# Altium PCB Pre_Amp_2017.PcbDoc
Units mm, origin at the board's own origin, x right, y up, seen from the top; angles counter-clockwise.
Board outline 152.4 x 101.6 mm, 2 copper layers (Top Layer, Bottom Layer); 45 components, 30 nets, 123 pads, 0 vias.
Unrouted connection lines stored in the file: 91.
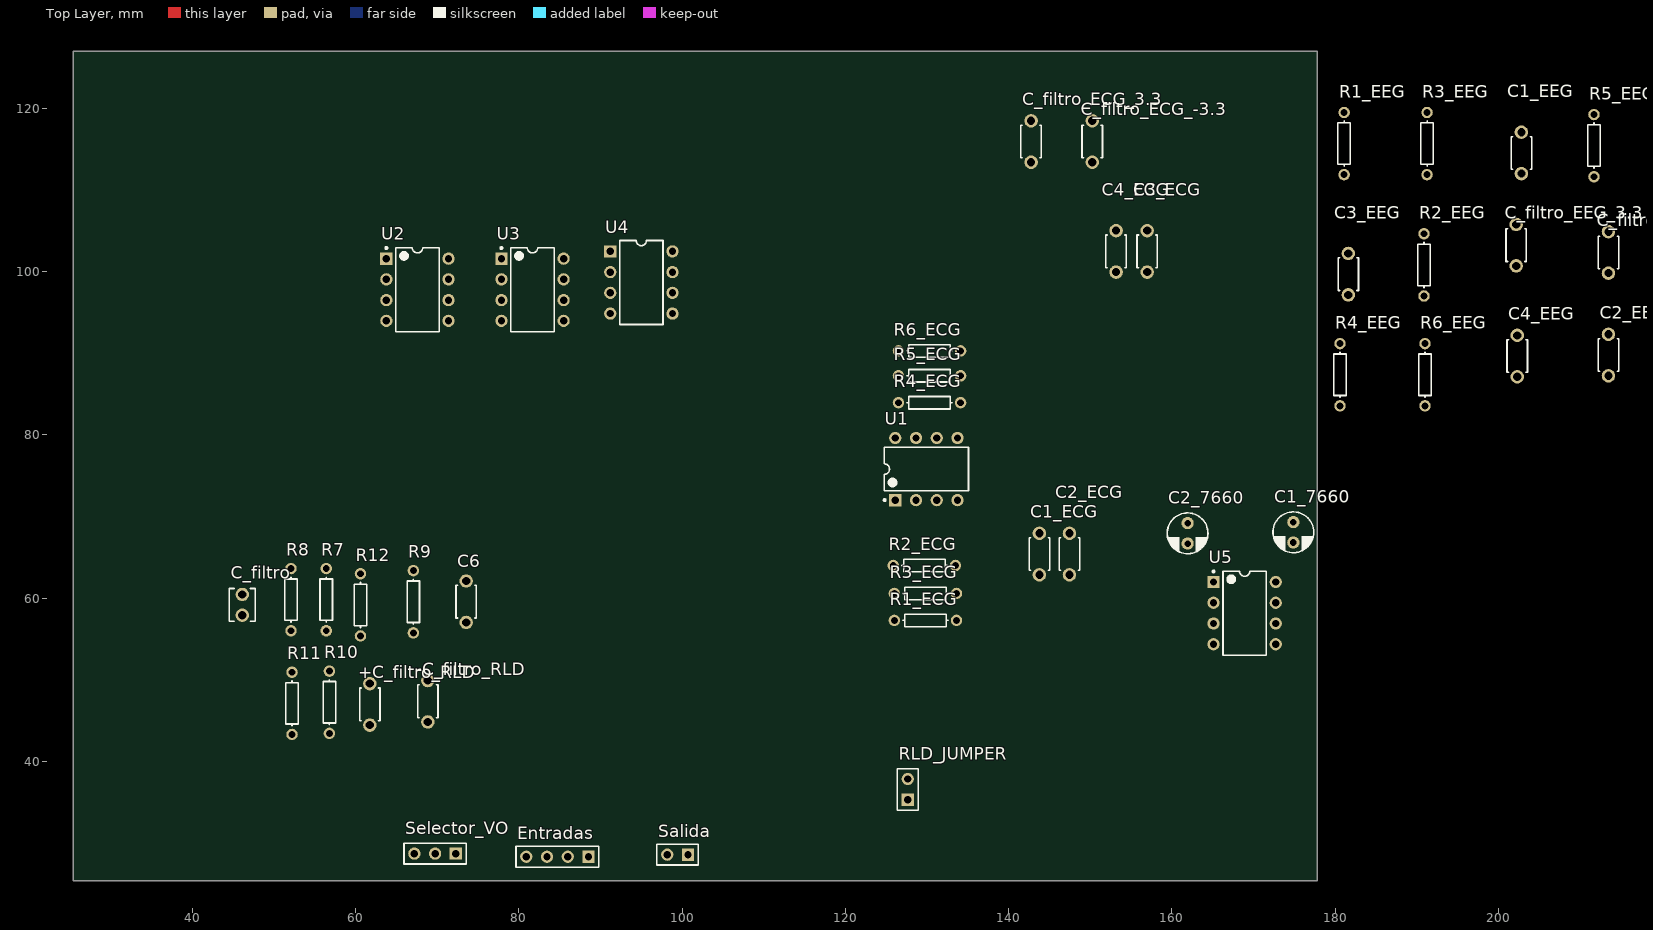
[diagram p0: Top Layer view]
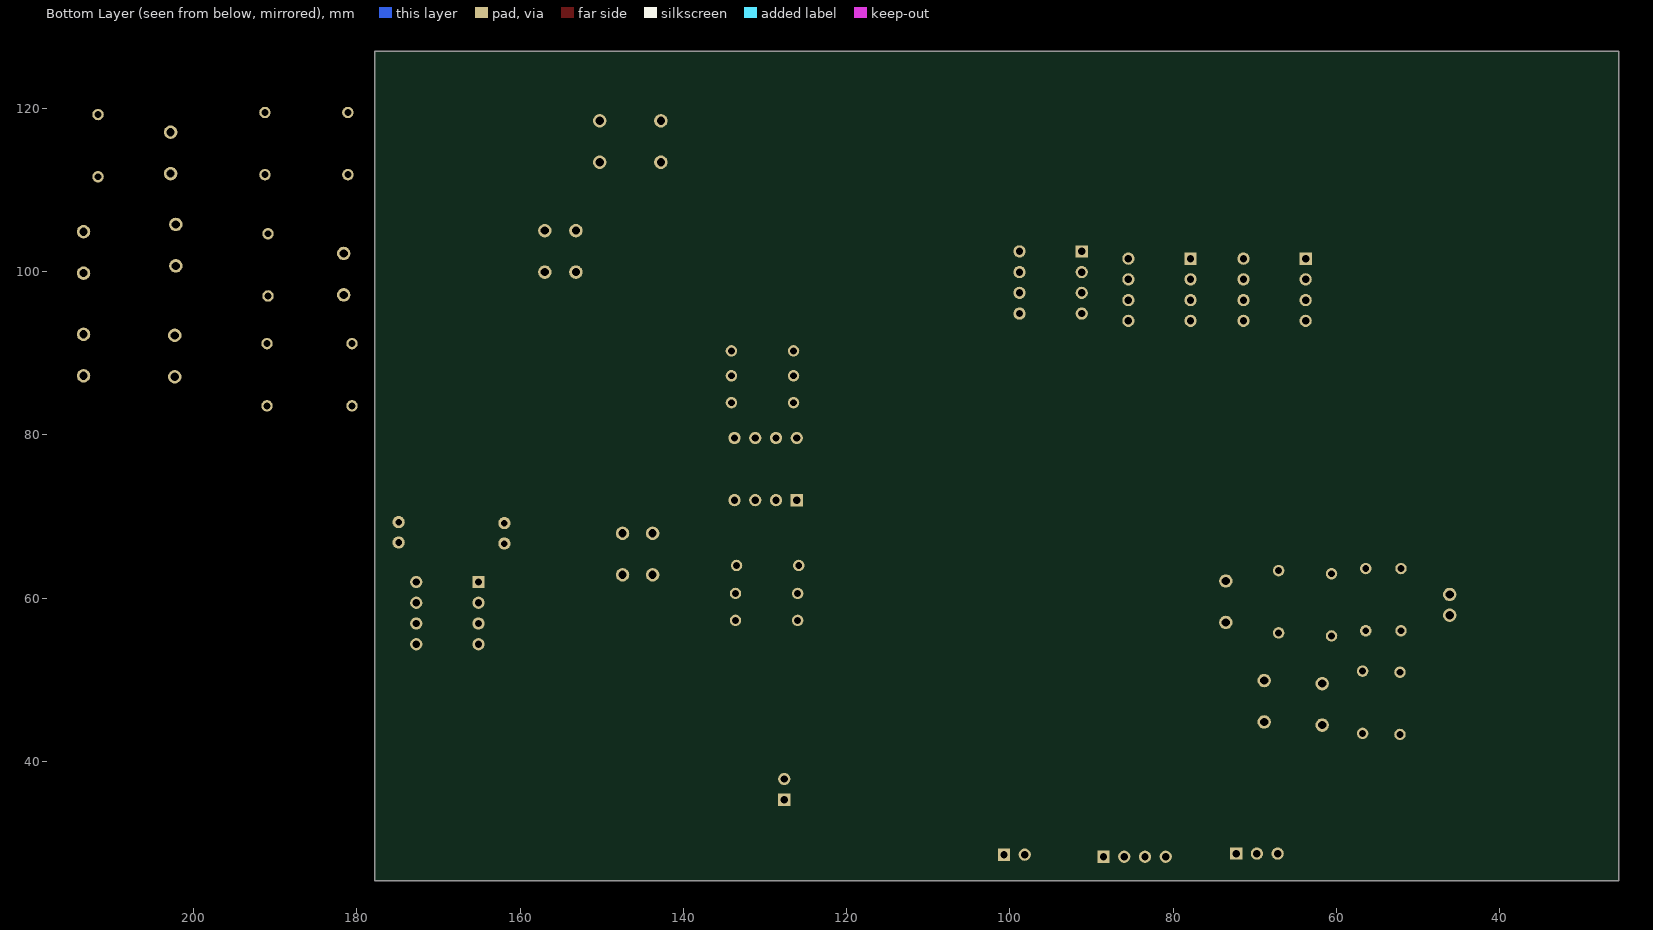
[diagram p1: Bottom Layer view, seen from below]

## Layer stack, top to bottom
Top Layer: signal copper 0.0356
Dielectric: dielectric 0.32, FR-4, Dk 4.8
Bottom Layer: signal copper 0.0356

## Board outline
25.4,25.4 177.8,25.4 177.8,127 25.4,127

## Design rules (kind name [scope] priority, off if disabled: settings)
Clearance [All] p1: gap=0.254
PolygonConnect [All] p1: connectstyle=Relief reliefconductorwidth=0.254 reliefentries=4 polygonreliefangle="90 Angle" airgapwidth=0.254
RoutingVias [All] p1: holewidth=0.711 width=1.27 viastyle="Through Hole" minholewidth=0.711 minwidth=1.27 maxholewidth=0.711 maxwidth=1.27
SolderMaskExpansion [All] p1: expansion=0.102
Width [All] p1: maxlimit=0.254 minlimit=0.254 preferedwidth=0.254
28 further rules are at their usual default settings.

## Components (designator, comment, footprint, x,y, rotation, side; value= is the part's Value field where it differs from the comment)
+C_filtro_RLD "100nF" VP40 61.722,46.99 r90 top
-C_filtro_RLD "100nF" VP40 68.834,47.371 r90 top
C1_7660 "C Pol" "C Elec TH V 4x7-2.5" 174.879,68.072 r90 top
C1_ECG "2.7nF" VP40 143.764,65.405 r270 top
C1_EEG "470nF" VP40 202.819,114.554 r90 top
C2_7660 "C Pol" "C Elec TH V 4x7-2.5" 161.925,67.945 r90 top
C2_ECG "39nF" VP40 147.447,65.405 r90 top
C2_EEG "39nF" VP40 213.487,89.789 r270 top
C3_ECG "15nF" VP40 156.972,102.489 r90 top
C3_EEG "2.7nF" VP40 181.61,99.695 r90 top
C4_ECG "39nF" VP40 153.162,102.489 r90 top
C4_EEG "39nF" VP40 202.311,89.662 r270 top
C6 "1nF" VP40 73.533,59.563 r270 top
C_filtro "100nF" VP31-3.2 46.101,59.182 r90 top
C_filtro_ECG_3.3 "100nF" VP40 142.748,115.951 r270 top
C_filtro_ECG_-3.3 "100nF" VP40 150.241,115.951 r90 top
C_filtro_EEG_3.3 "100nF" VP40 202.184,103.251 r90 top
C_filtro_EEG_-3.3 "100nF" VP40 213.487,102.362 r90 top
Entradas "Header 4" HDR1X4 88.519,28.321 r180 top
R1_ECG "Res1" AXIAL-0.3 129.794,57.277 r0 top
R1_EEG "Res1" AXIAL-0.3 181.102,115.697 r90 top
R2_ECG "Res1" AXIAL-0.3 129.667,64.008 r0 top
R2_EEG "Res1" AXIAL-0.3 190.881,100.838 r90 top
R3_ECG "Res1" AXIAL-0.3 129.794,60.579 r180 top
R3_EEG "Res1" AXIAL-0.3 191.262,115.697 r90 top
R4_ECG "Res1" AXIAL-0.3 130.302,83.947 r0 top
R4_EEG "Res1" AXIAL-0.3 180.594,87.376 r90 top
R5_ECG "Res1" AXIAL-0.3 130.302,87.249 r180 top
R5_EEG "Res1" AXIAL-0.3 211.709,115.443 r90 top
R6_ECG "Res1" AXIAL-0.3 130.302,90.297 r0 top
R6_EEG "Res1" AXIAL-0.3 191.008,87.376 r90 top
R7 "Res1" AXIAL-0.3 56.388,59.817 r90 top
R8 "Res1" AXIAL-0.3 52.07,59.817 r90 top
R9 "Res1" AXIAL-0.3 67.056,59.563 r90 top
R10 "100" AXIAL-0.3 56.769,47.244 r90 top
R11 "Res1" AXIAL-0.3 52.197,47.117 r90 top
R12 "Res1" AXIAL-0.3 60.579,59.182 r90 top
RLD_JUMPER "Header 2" HDR1X2 127.635,35.306 r90 top
Salida "Header 2" HDR1X2 100.711,28.575 r180 top
Selector_VO "Header 3" HDR1X3 72.263,28.702 r180 top
U1 "LT1358CN8" N8 129.921,75.819 r90 top
U2 "LT1358CN8" N8 67.564,97.79 r0 top
U3 "LT1358CN8" N8 81.661,97.79 r0 top
U4 "AD620" DIP8 94.996,98.679 r270 top
U5 "LMC7660IN/NOPB" N08E 168.91,58.166 r0 top

## Footprints (in the part's own frame and the unit in brackets; to place one, negate y for a bottom-side part, rotate by r counter-clockwise, add the part's x,y. Pads: shape width x height; smd on the part's side, far side on the other; paste and mask are expansions set on the pad)
AXIAL-0.3 [mm] "Axial Device, Thru-Hole; 2 Leads; 0.3 in Pin Spacing"
  round 1.4 hole 0.85: 1(-3.81,0) 2(3.81,0)
  silkscreen extent -2.77,-0.76 2.77,0.76
"C Elec TH V 4x7-2.5" [mm] "C Elec TH 4x7 2.5mm pitch"
  round 1.5 hole 0.8: 1(-1.25,0) 2(1.25,0)
  silkscreen extent -2.5,-2.5 2.5,2.5, body extent -1.99,-1.98 2,1.98, height 7.05
DIP8 [mm] "DIP; 8 Leads; Row Spacing 7.62 mm; Pitch 2.54 mm"
  rect 1.5x1.5 hole 0.9: 1(-3.81,-3.81)
  round 1.5 hole 0.9: 2(-1.27,-3.81) 3(1.27,-3.81) 4(3.81,-3.81) 5(3.81,3.81) 6(1.27,3.81) 7(-1.27,3.81) 8(-3.81,3.81)
  silkscreen extent -5.15,-2.65 5.15,2.65
HDR1X2 [mm] "Connector; Header; 2 Position"
  rect 1.5x1.5 hole 0.9: 1(0,0)
  round 1.5 hole 0.9: 2(2.54,0)
  silkscreen extent -1.27,-1.27 3.81,1.27
HDR1X3 [mm] "Connector; Header; 3 Position"
  rect 1.5x1.5 hole 0.9: 1(0,0)
  round 1.5 hole 0.9: 2(2.54,0) 3(5.08,0)
  silkscreen extent -1.27,-1.27 6.35,1.27
HDR1X4 [mm] "Connector; Header; 4 Position"
  rect 1.5x1.5 hole 0.9: 1(0,0)
  round 1.5 hole 0.9: 2(2.54,0) 3(5.08,0) 4(7.62,0)
  silkscreen extent -1.27,-1.27 8.89,1.27
N8 [mm] "DIP, 8-Leads, Row Spacing 7.62mm, Pitch 2.54mm, Body 9.78x6.48mm"
  rect 1.5x1.5 hole 0.9: 1(-3.81,3.81)
  round 1.5 hole 0.9: 2(-3.81,1.27) 3(-3.81,-1.27) 4(-3.81,-3.81) 5(3.81,-3.81) 6(3.81,-1.27) 7(3.81,1.27) 8(3.81,3.81)
  silkscreen extent -3.93,-5.15 2.65,5.23, body extent -3.6,-5.15 3.6,5.15, height 4.45
N08E [mm] "DIP, 8-Pin, Row Spacing 7.62 mm, Pitch 2.54 mm"
  rect 1.5x1.5 hole 0.9: 1(-3.81,3.81)
  round 1.5 hole 0.9: 2(-3.81,1.27) 3(-3.81,-1.27) 4(-3.81,-3.81) 5(3.81,-3.81) 6(3.81,-1.27) 7(3.81,1.27) 8(3.81,3.81)
  silkscreen extent -3.93,-5.15 2.65,5.23, body extent -3.6,-5.15 3.6,5.15, height 5.34
VP31-3.2 [mm] "Capacitor, Ceramic, Thru-Hole, Dipped Radial; Body 4 x 3.2 mm (WxT) Pin Spacing 2.54 mm (typ)"
  round 1.65 hole 1: 1(-1.27,0) 2(1.27,0)
  silkscreen extent -2,-1.6 2,1.6
VP40 [mm] "Capacitor, Ceramic, Thru-Hole, Dipped Radial; Body 4 x 2.5 mm (WxT) Pin Spacing 5.08 mm (typ)"
  round 1.65 hole 1: 1(-2.54,0) 2(2.54,0)
  silkscreen extent -2,-1.25 2,1.25

## Part data
+C_filtro_RLD -C_filtro_RLD C1_ECG C1_EEG C2_ECG C2_EEG C3_ECG C3_EEG C4_ECG C4_EEG C6 C_filtro_ECG_3.3 C_filtro_ECG_-3.3 C_filtro_EEG_3.3 C_filtro_EEG_-3.3: library part VP40BA181KA, "Dipped Radial Multilayer Ceramic Capacitor COG (NPO): 180pF, 50/63V"
C1_7660 C2_7660: "Capacitor, polarized, generic"
C_filtro: library part VP31BA820KC, "Dipped Radial Multilayer Ceramic Capacitor COG (NPO): 82pF, 200V"
Entradas: "Header, 4-Pin"
R1_ECG R1_EEG R2_ECG R2_EEG R3_ECG R3_EEG R4_ECG R4_EEG R5_ECG R5_EEG R6_ECG R6_EEG R7 R8 R9 R11 R12: "Resistor"
R10: library part Res1, "Resistor"
RLD_JUMPER Salida: "Header, 2-Pin"
Selector_VO: "Header, 3-Pin"
U1 U2 U3: "Dual 25MHz, 600V/µs Operational Amplifier"
U4: library part INA129
U5: "Switched Capacitor Voltage Converter, 8-pin MDIP, Pb-Free"

## Nets (pads, with @x,y where several pads share a name; then routed paths per layer and width w, separated by ;. In a path a pad name is that pad's centre, name@x,y a point inside that pad or via, vN(x,y) a via of type N, cw(c..) or ccw(c..) an arc to the next point about the centre after c; other vN are vias at no path point)
3.3V: +C_filtro_RLD.2 C_filtro.2 C_filtro_ECG_3.3.2 C_filtro_EEG_3.3.2 U1.8 U2.8 U3.8 U4.7 U5.8
-3.3V: -C_filtro_RLD.2 C2_7660.1 C_filtro_ECG_-3.3.2 C_filtro_EEG_-3.3.2 U1.4 U2.4 U3.4 U4.4 U5.5
GND: +C_filtro_RLD.1 -C_filtro_RLD.1 C2_7660.2 C2_ECG.1 C2_EEG.1 C4_ECG.1 C4_EEG.1 C_filtro.1 C_filtro_ECG_3.3.1 C_filtro_ECG_-3.3.1 C_filtro_EEG_3.3.1 C_filtro_EEG_-3.3.1 R11.2 Salida.2 U1.3 U1.5 U2.3 U2.5 U3.5 U4.5 U5.3 U5.6
NetC1_7660_1: C1_7660.1 U5.4
NetC1_7660_2: C1_7660.2 U5.2
NetC1_ECG_1: C1_ECG.1 R3_ECG.2 U1.2
NetC1_ECG_2: C1_ECG.2 R2_ECG.1 R4_ECG.1 U1.1
NetC1_EEG_1: C1_EEG.1 R3_EEG.2 U2.2
NetC1_EEG_2: C1_EEG.2 R2_EEG.1 R4_EEG.1 U2.1
NetC2_ECG_2: C2_ECG.2 R1_ECG.2 R2_ECG.2 R3_ECG.1
NetC2_EEG_2: C2_EEG.2 R1_EEG.2 R2_EEG.2 R3_EEG.1
NetC3_ECG_1: C3_ECG.1 R6_ECG.1 U1.6
NetC3_ECG_2: C3_ECG.2 R5_ECG.2 Selector_VO.1 U1.7
NetC3_EEG_1: C3_EEG.1 R6_EEG.1 U2.6
NetC3_EEG_2: C3_EEG.2 R5_EEG.2 Selector_VO.3 U2.7
NetC4_ECG_2: C4_ECG.2 R4_ECG.2 R5_ECG.1 R6_ECG.2
NetC4_EEG_2: C4_EEG.2 R4_EEG.2 R5_EEG.1 R6_EEG.2
NetC6_1: C6.1 Entradas.3 R12.2
NetC6_2: C6.2 R9.1 U3.6
NetEntradas_1: Entradas.1 U4.3
NetEntradas_2: Entradas.2 U4.2
NetEntradas_4: Entradas.4 R10.2 R11.1
NetR1_ECG_1: R1_ECG.1 R1_EEG.1 U4.6
NetR7_1: R7.1 R8.2 RLD_JUMPER.2
NetR7_2: R7.2 U4.8
NetR8_1: R8.1 U4.1
NetR9_2: R9.2 R10.1 U3.1 U3.2
NetR12_1: R12.1 U3.7
NetRLD_JUMPER_1: RLD_JUMPER.1 U3.3
NetSalida_1: Salida.1 Selector_VO.2
pads on no net: U5.1 U5.7